# Altium PCB STM32F302VC_EVM.PcbDoc (part 2 of 19)
Units mil, origin at the board's own origin, x right, y up, seen from the top; angles counter-clockwise.
Board outline 3937.01 x 3937.01 mil, 2 copper layers (Top Layer, Bottom Layer); 117 components, 166 nets, 602 pads, 373 vias.
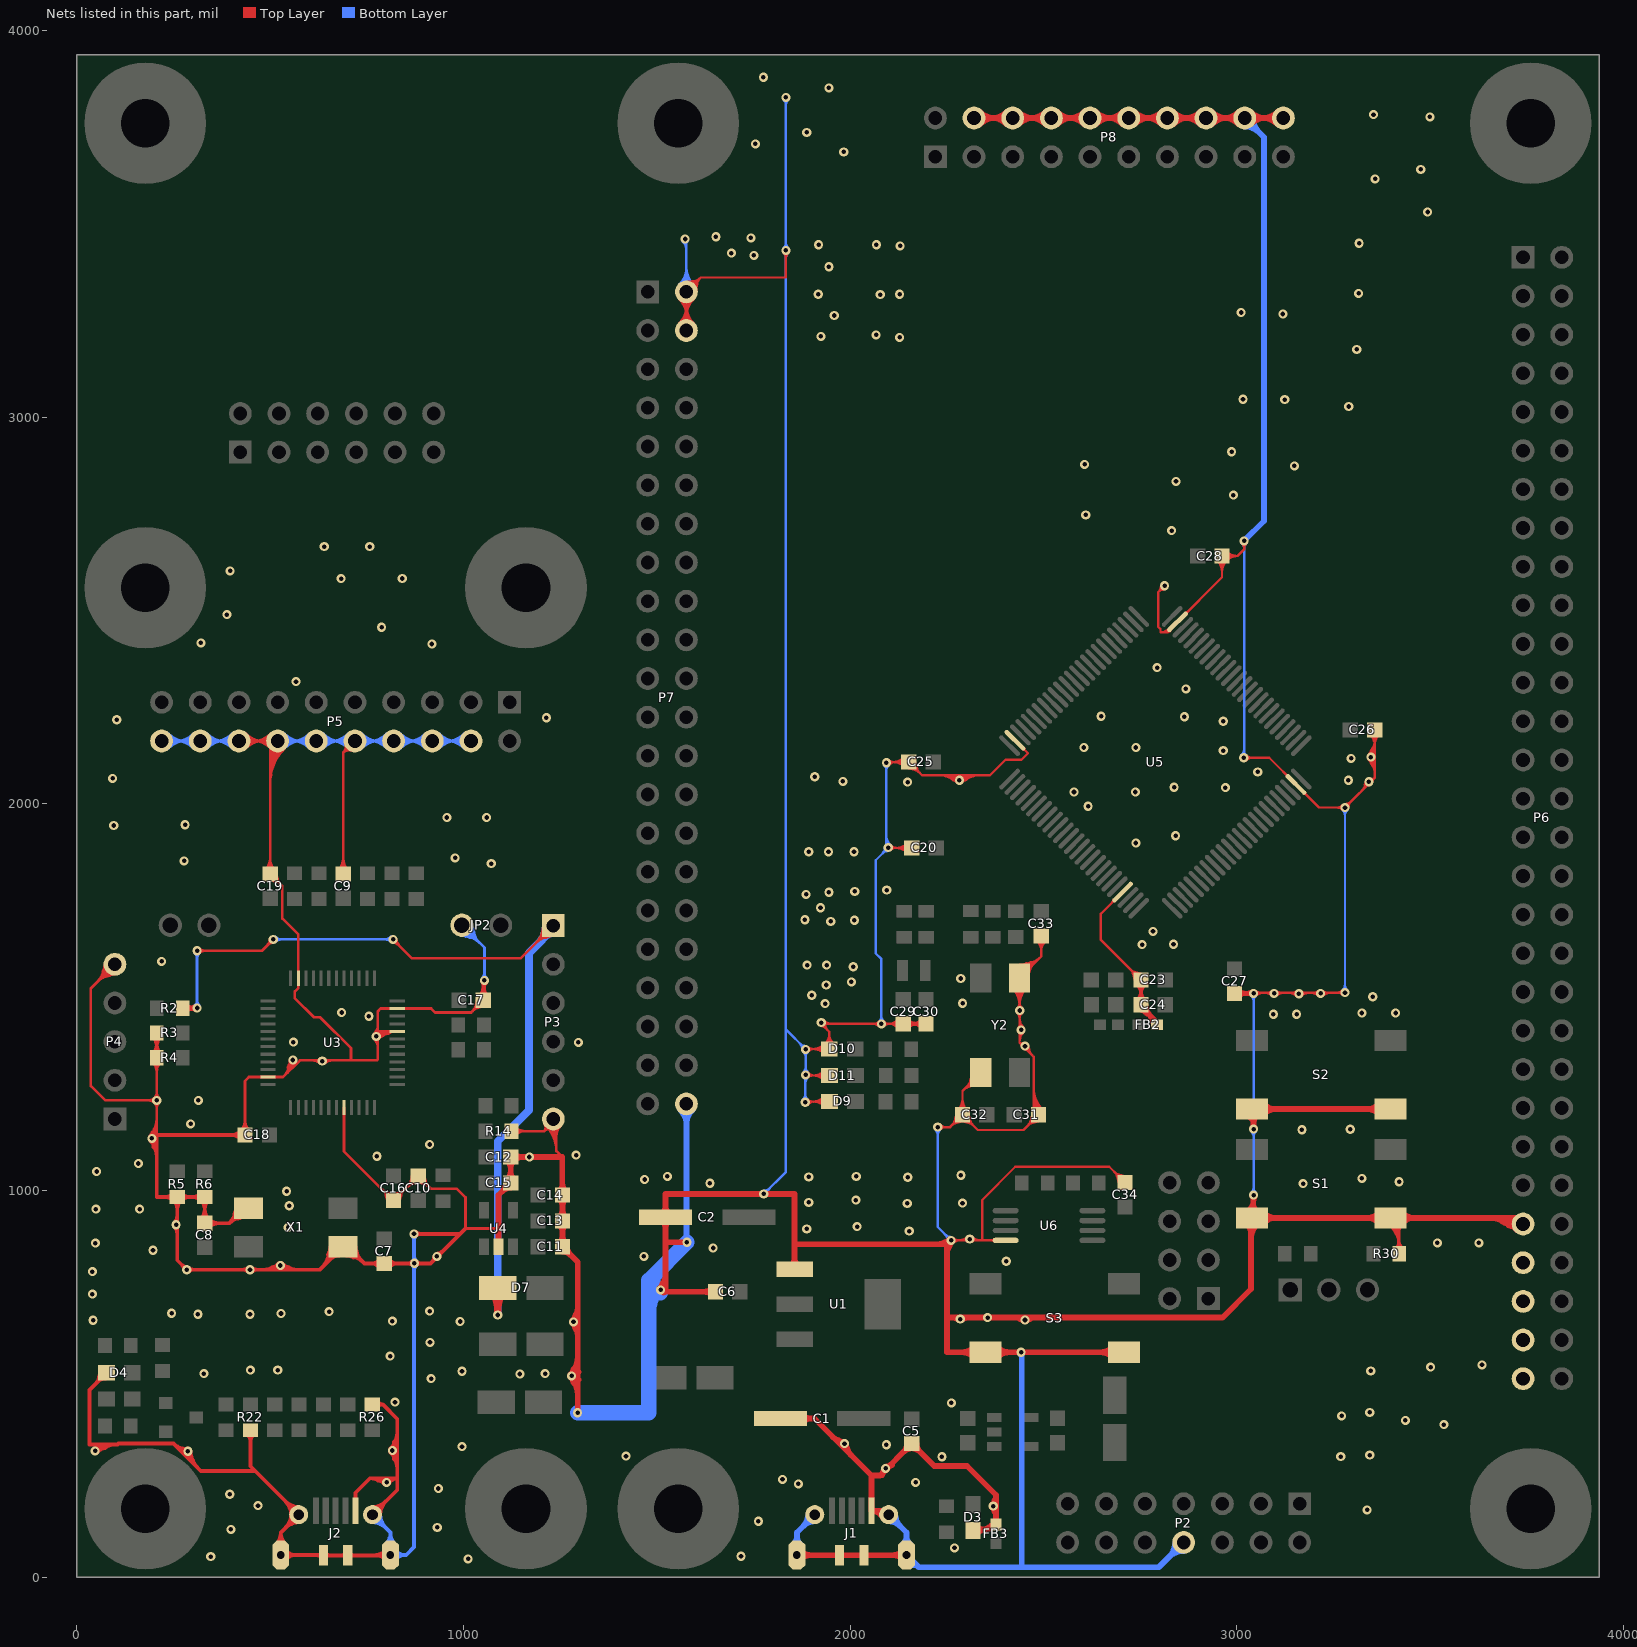
[diagram p2: the nets of this part, all layers, seen from the top]

## Via types
v1: diameter 23.62, hole 11.81, Top Layer to Bottom Layer, tented both sides, 372 vias
v2: diameter 50, hole 28, Top Layer to Bottom Layer, tented both sides, 1 vias

## Nets (pads, with @x,y where several pads share a name; then routed paths per layer and width w, separated by ;. In a path a pad name is that pad's centre, name@x,y a point inside that pad or via, vN(x,y) a via of type N, cw(c..) or ccw(c..) an arc to the next point about the centre after c; other vN are vias at no path point) (continued)
AVDD: C23.2 C24.2 FB2.2 U5.22 | length 2610.4
  Top Layer w6: U5.22@2704.46,1771.83 2648.25,1715.62 2648.25,1648.15 C23.2@2751.97,1544.43 ; 2678.62,1745.99 cw(c2683.58,1741.03) U5.22@2683.58,1748.04 ; 2678.62,1745.99 ccw(c2673.66,1750.95) U5.22@2680.68,1750.95 ; 2678.62,1745.99 ccw(c2673.66,1750.95) U5.22@2680.68,1750.95 ; 2678.62,1745.99 cw(c2683.58,1741.03) U5.22@2683.58,1748.04 ; 2678.62,1745.99 ccw(c2673.66,1750.95) U5.22@2680.68,1750.95 ; 2678.62,1745.99 cw(c2683.58,1741.03) U5.22@2683.58,1748.04 ; 2723.49,1572.91 cw(c2695,1544.43) C23.2@2735.28,1544.43 ; 2723.49,1572.91 ccw(c2751.97,1601.4) C23.2@2751.97,1561.11 ; 2723.49,1572.91 ccw(c2751.97,1601.4) C23.2@2751.97,1561.11 ; 2723.49,1572.91 cw(c2695,1544.43) C23.2@2735.28,1544.43 ; 2723.49,1572.91 ccw(c2751.97,1601.4) C23.2@2751.97,1561.11 ; 2723.49,1572.91 cw(c2695,1544.43) C23.2@2735.28,1544.43 ; 2730.2,1563.39 ccw(c2757.34,1570.67) C23.2@2751.7,1543.14 ; 2730.2,1563.39 ccw(c2757.34,1570.67) C23.2@2751.7,1543.14 ; 2730.2,1563.39 ccw(c2757.34,1570.67) C23.2@2751.7,1543.14 ; C23.2@2732.71,1554.02 ccw(c2755.16,1560.03) C23.2@2750.5,1537.26 ; C23.2@2732.71,1554.02 ccw(c2755.16,1560.03) C23.2@2750.5,1537.26 ; C23.2@2732.71,1554.02 ccw(c2755.16,1560.03) C23.2@2750.5,1537.26 ; 2733,1566.2 cw(c2725.73,1539.06) C23.2@2753.26,1544.69 ; 2733,1566.2 cw(c2725.73,1539.06) C23.2@2753.26,1544.69 ; 2733,1566.2 cw(c2725.73,1539.06) C23.2@2753.26,1544.69 ; C23.2@2733.73,1562.67 cw(c2715.49,1544.43) C23.2@2741.28,1544.43 ; C23.2@2733.73,1562.67 ccw(c2751.97,1580.91) C23.2@2751.97,1555.11 ; C23.2@2733.73,1562.67 ccw(c2751.97,1580.91) C23.2@2751.97,1555.11 ; C23.2@2733.73,1562.67 cw(c2715.49,1544.43) C23.2@2741.28,1544.43 ; C23.2@2733.73,1562.67 ccw(c2751.97,1580.91) C23.2@2751.97,1555.11 ; C23.2@2733.73,1562.67 cw(c2715.49,1544.43) C23.2@2741.28,1544.43 ; C23.2@2742.38,1563.68 cw(c2736.37,1541.23) C23.2@2759.13,1545.9 ; C23.2@2742.38,1563.68 cw(c2736.37,1541.23) C23.2@2759.13,1545.9 ; C23.2@2742.38,1563.68 cw(c2736.37,1541.23) C23.2@2759.13,1545.9
  Top Layer w10: C23.2@2751.97,1544.43 C24.2@2751.97,1480.45 2751.97,1478.54 2793.31,1437.2 FB2.2@2793.31,1429.13 ; C24.2@2741.58,1490.84 ccw(c2716.52,1515.91) 2751.97,1515.91 ; C24.2@2741.58,1490.84 ccw(c2716.52,1515.91) 2751.97,1515.91 ; C24.2@2741.58,1490.84 ccw(c2716.52,1515.91) 2751.97,1515.91 ; C23.2@2741.58,1534.05 cw(c2716.52,1508.98) 2751.97,1508.98 ; C23.2@2741.58,1534.05 cw(c2716.52,1508.98) 2751.97,1508.98 ; C23.2@2741.58,1534.05 cw(c2716.52,1508.98) 2751.97,1508.98 ; C24.2@2748.17,1466.27 cw(c2734.25,1414.31) FB2.2@2780.83,1441.21 ; C24.2@2748.17,1466.27 cw(c2734.25,1414.31) FB2.2@2780.83,1441.21 ; C24.2@2748.17,1466.27 cw(c2734.25,1414.31) FB2.2@2780.83,1441.21 ; C24.2@2748.17,1466.27 cw(c2734.25,1414.31) FB2.2@2780.83,1441.21 ; C24.2@2748.17,1466.27 cw(c2734.25,1414.31) FB2.2@2780.83,1441.21 ; C24.2@2750.76,1475.93 cw(c2743.08,1447.29) C24.2@2768.76,1462.11 ; C24.2@2750.76,1475.93 cw(c2743.08,1447.29) C24.2@2768.76,1462.11 ; C24.2@2750.76,1475.93 cw(c2743.08,1447.29) C24.2@2768.76,1462.11 ; C24.2@2750.76,1475.93 cw(c2743.08,1447.29) C24.2@2768.76,1462.11 ; C24.2@2750.76,1475.93 cw(c2743.08,1447.29) C24.2@2768.76,1462.11 ; C24.2@2751.97,1465.77 cw(c2751.97,1434.94) 2773.77,1456.74 ; C24.2@2751.97,1465.77 cw(c2751.97,1434.94) 2773.77,1456.74 ; C24.2@2751.97,1465.77 cw(c2751.97,1434.94) 2773.77,1456.74 ; 2751.97,1508.98 cw(c2787.42,1508.98) C23.2@2762.35,1534.05 ; 2751.97,1508.98 cw(c2787.42,1508.98) C23.2@2762.35,1534.05 ; 2751.97,1508.98 cw(c2787.42,1508.98) C23.2@2762.35,1534.05 ; 2751.97,1515.91 ccw(c2787.42,1515.91) C24.2@2762.35,1490.84 ; 2751.97,1515.91 ccw(c2787.42,1515.91) C24.2@2762.35,1490.84 ; 2751.97,1515.91 ccw(c2787.42,1515.91) C24.2@2762.35,1490.84 ; C24.2@2753.26,1485.61 cw(c2747.76,1463.7) C24.2@2769.57,1469.55 ; C24.2@2753.26,1485.61 cw(c2747.76,1463.7) C24.2@2769.57,1469.55 ; C24.2@2753.26,1485.61 cw(c2747.76,1463.7) C24.2@2769.57,1469.55 ; C24.2@2756.55,1479.49 ccw(c2778.78,1474.82) 2767.42,1455.15 ; C24.2@2756.55,1479.49 ccw(c2778.78,1474.82) 2767.42,1455.15 ; C24.2@2756.55,1479.49 ccw(c2778.78,1474.82) 2767.42,1455.15 ; C24.2@2756.55,1479.49 ccw(c2778.78,1474.82) 2767.42,1455.15 ; C24.2@2766.15,1476.65 ccw(c2782.69,1472.22) C24.2@2767.86,1463.66 ; C24.2@2766.15,1476.65 ccw(c2782.69,1472.22) C24.2@2767.86,1463.66 ; C24.2@2766.15,1476.65 ccw(c2782.69,1472.22) C24.2@2767.86,1463.66 ; C24.2@2766.15,1476.65 ccw(c2782.69,1472.22) C24.2@2767.86,1463.66 ; C24.2@2766.15,1476.65 ccw(c2782.69,1472.22) C24.2@2767.86,1463.66 ; C24.2@2766.65,1480.45 ccw(c2806.73,1480.45) 2778.39,1452.12 ; C24.2@2766.65,1480.45 ccw(c2806.73,1480.45) 2778.39,1452.12 ; C24.2@2766.65,1480.45 ccw(c2806.73,1480.45) 2778.39,1452.12 ; C24.2@2769.26,1461.25 cw(c2737.14,1429.13) FB2.2@2782.56,1429.13 ; C24.2@2769.26,1461.25 cw(c2737.14,1429.13) FB2.2@2782.56,1429.13 ; C24.2@2769.26,1461.25 cw(c2737.14,1429.13) FB2.2@2782.56,1429.13 ; 2775.25,1446.79 cw(c2757.59,1429.13) FB2.2@2782.56,1429.13 ; 2775.25,1446.79 cw(c2757.59,1429.13) FB2.2@2782.56,1429.13 ; 2775.25,1446.79 cw(c2757.59,1429.13) FB2.2@2782.56,1429.13 ; 2775.25,1446.79 cw(c2757.59,1429.13) FB2.2@2782.56,1429.13 ; 2775.25,1446.79 cw(c2757.59,1429.13) FB2.2@2782.56,1429.13 ; 2775.25,1446.79 cw(c2757.59,1429.13) FB2.2@2782.56,1429.13 ; 2778.74,1443.38 ccw(c2802.7,1449.8) FB2.2@2790.75,1428.06 ; 2778.74,1443.38 ccw(c2802.7,1449.8) FB2.2@2790.75,1428.06 ; 2778.74,1443.38 ccw(c2802.7,1449.8) FB2.2@2790.75,1428.06 ; 2779.02,1443.02 ccw(c2791.34,1455.34) FB2.2@2791.34,1437.91 ; 2779.02,1443.02 ccw(c2791.34,1455.34) FB2.2@2791.34,1437.91 ; 2779.02,1443.02 ccw(c2791.34,1455.34) FB2.2@2791.34,1437.91 ; 2779.02,1443.02 ccw(c2791.34,1455.34) FB2.2@2791.34,1437.91 ; 2779.02,1443.02 ccw(c2791.34,1455.34) FB2.2@2791.34,1437.91 ; 2779.02,1443.02 ccw(c2791.34,1455.34) FB2.2@2791.34,1437.91 ; 2786.33,1444.18 cw(c2771.28,1429.13) FB2.2@2792.56,1429.13 ; 2786.33,1444.18 cw(c2771.28,1429.13) FB2.2@2792.56,1429.13 ; 2786.33,1444.18 cw(c2771.28,1429.13) FB2.2@2792.56,1429.13
E5V: D7.2 P3.1 R2.1 | length 5067.3
  Top Layer w7: R2.1@273.62,1471.46 274.25,1472.08 v1(311.02,1472.08) ; v1(311.02,1620.08) 478.35,1620.08 v1(507.87,1649.61) ; v1(817.91,1649.61) 867.13,1600.39 1147.64,1600.39 P3.1@1232.28,1685.04 ; R2.1@278.72,1466.35 cw(c292.56,1452.52) 292.56,1472.08 ; R2.1@278.72,1466.35 cw(c292.56,1452.52) 292.56,1472.08 ; R2.1@278.72,1466.35 cw(c292.56,1452.52) 292.56,1472.08 ; R2.1@283.67,1461.4 cw(c309.46,1435.62) v1@309.46,1472.08 ; R2.1@283.67,1461.4 cw(c309.46,1435.62) v1@309.46,1472.08 ; R2.1@283.67,1461.4 cw(c309.46,1435.62) v1@309.46,1472.08 ; R2.1@283.67,1481.51 ccw(c306.43,1504.26) v1@306.43,1472.08 ; R2.1@283.67,1481.51 ccw(c306.43,1504.26) v1@306.43,1472.08 ; R2.1@283.67,1481.51 ccw(c306.43,1504.26) v1@306.43,1472.08 ; R2.1@290.96,1472.08 cw(c290.96,1452.02) v1@305.15,1466.21 ; R2.1@290.96,1472.08 ccw(c290.96,1492.15) v1@305.15,1477.96 ; R2.1@290.96,1472.08 ccw(c290.96,1492.15) v1@305.15,1477.96 ; R2.1@290.96,1472.08 cw(c290.96,1452.02) v1@305.15,1466.21 ; R2.1@290.96,1472.08 ccw(c290.96,1492.15) v1@305.15,1477.96 ; R2.1@290.96,1472.08 cw(c290.96,1452.02) v1@305.15,1466.21 ; 291.9,1467.38 cw(c296.64,1449.73) v1@306.53,1465.1 ; 291.9,1467.38 cw(c296.64,1449.73) v1@306.53,1465.1 ; 291.9,1467.38 cw(c296.64,1449.73) v1@306.53,1465.1 ; 291.9,1467.38 cw(c296.64,1449.73) v1@306.53,1465.1 ; 291.9,1467.38 cw(c296.64,1449.73) v1@306.53,1465.1 ; 291.9,1467.38 cw(c296.64,1449.73) v1@306.53,1465.1 ; 292.33,1475.86 ccw(c296.34,1490.84) v1@305.9,1478.63 ; 292.33,1475.86 ccw(c296.34,1490.84) v1@305.9,1478.63 ; 292.33,1475.86 ccw(c296.34,1490.84) v1@305.9,1478.63 ; 292.33,1475.86 ccw(c296.34,1490.84) v1@305.9,1478.63 ; 292.33,1475.86 ccw(c296.34,1490.84) v1@305.9,1478.63 ; 292.33,1475.86 ccw(c296.34,1490.84) v1@305.9,1478.63 ; 292.48,1467.54 ccw(c287.65,1485.58) v1@303.83,1476.24 ; 292.48,1467.54 ccw(c287.65,1485.58) v1@303.83,1476.24 ; 292.48,1467.54 ccw(c287.65,1485.58) v1@303.83,1476.24 ; 292.48,1467.54 ccw(c287.65,1485.58) v1@303.83,1476.24 ; 292.48,1467.54 ccw(c287.65,1485.58) v1@303.83,1476.24 ; 292.48,1467.54 ccw(c287.65,1485.58) v1@303.83,1476.24 ; 294.11,1475.39 cw(c289.97,1459.93) v1@303.83,1467.93 ; 294.11,1475.39 cw(c289.97,1459.93) v1@303.83,1467.93 ; 294.11,1475.39 cw(c289.97,1459.93) v1@303.83,1467.93 ; 294.11,1475.39 cw(c289.97,1459.93) v1@303.83,1467.93 ; 294.11,1475.39 cw(c289.97,1459.93) v1@303.83,1467.93 ; 294.11,1475.39 cw(c289.97,1459.93) v1@303.83,1467.93 ; v1@316.9,1614.2 cw(c331.09,1600.01) 331.09,1620.08 ; v1@316.9,1614.2 cw(c331.09,1600.01) 331.09,1620.08 ; v1@316.9,1614.2 cw(c331.09,1600.01) 331.09,1620.08 ; v1@316.9,1625.96 ccw(c331.09,1640.14) 331.09,1620.08 ; v1@316.9,1625.96 ccw(c331.09,1640.14) 331.09,1620.08 ; v1@316.9,1625.96 ccw(c331.09,1640.14) 331.09,1620.08 ; 493.69,1635.42 cw(c507.87,1621.23) v1@507.87,1641.3 ; 493.69,1635.42 ccw(c479.5,1649.61) v1@499.56,1649.61 ; 493.69,1635.42 ccw(c479.5,1649.61) v1@499.56,1649.61 ; 493.69,1635.42 cw(c507.87,1621.23) v1@507.87,1641.3 ; 493.69,1635.42 ccw(c479.5,1649.61) v1@499.56,1649.61 ; 493.69,1635.42 cw(c507.87,1621.23) v1@507.87,1641.3 ; 495.35,1637.94 ccw(c491.32,1653) v1@506.59,1649.87 ; 495.35,1637.94 ccw(c491.32,1653) v1@506.59,1649.87 ; 495.35,1637.94 ccw(c491.32,1653) v1@506.59,1649.87 ; 496.21,1637.09 cw(c511.26,1633.05) v1@508.14,1648.32 ; 496.21,1637.09 cw(c511.26,1633.05) v1@508.14,1648.32 ; 496.21,1637.09 cw(c511.26,1633.05) v1@508.14,1648.32 ; v1@817.65,1648.32 cw(c814.52,1633.05) 829.58,1637.09 ; v1@817.65,1648.32 cw(c814.52,1633.05) 829.58,1637.09 ; v1@817.65,1648.32 cw(c814.52,1633.05) 829.58,1637.09 ; v1@817.91,1641.3 cw(c817.91,1621.23) 832.1,1635.42 ; v1@817.91,1641.3 cw(c817.91,1621.23) 832.1,1635.42 ; v1@817.91,1641.3 cw(c817.91,1621.23) 832.1,1635.42 ; v1@819.2,1649.87 ccw(c834.47,1653) 830.43,1637.94 ; v1@819.2,1649.87 ccw(c834.47,1653) 830.43,1637.94 ; v1@819.2,1649.87 ccw(c834.47,1653) 830.43,1637.94 ; v1@826.22,1649.61 ccw(c846.29,1649.61) 832.1,1635.42 ; v1@826.22,1649.61 ccw(c846.29,1649.61) 832.1,1635.42 ; v1@826.22,1649.61 ccw(c846.29,1649.61) 832.1,1635.42 ; 1187.85,1640.61 cw(c1232.28,1596.18) P3.1@1232.28,1659.01 ; 1187.85,1640.61 ccw(c1143.42,1685.04) P3.1@1206.26,1685.04 ; 1187.85,1640.61 ccw(c1143.42,1685.04) P3.1@1206.26,1685.04 ; 1187.85,1640.61 cw(c1232.28,1596.18) P3.1@1232.28,1659.01 ; 1187.85,1640.61 ccw(c1143.42,1685.04) P3.1@1206.26,1685.04 ; 1187.85,1640.61 cw(c1232.28,1596.18) P3.1@1232.28,1659.01 ; 1199.8,1652.56 cw(c1232.28,1620.08) P3.1@1232.28,1666.01 ; 1199.8,1652.56 ccw(c1167.32,1685.04) P3.1@1213.26,1685.04 ; 1199.8,1652.56 ccw(c1167.32,1685.04) P3.1@1213.26,1685.04 ; 1199.8,1652.56 cw(c1232.28,1620.08) P3.1@1232.28,1666.01 ; 1199.8,1652.56 ccw(c1167.32,1685.04) P3.1@1213.26,1685.04 ; 1199.8,1652.56 cw(c1232.28,1620.08) P3.1@1232.28,1666.01 ; 1202.58,1651.05 ccw(c1191.21,1693.45) P3.1@1234.22,1684.64 ; 1202.58,1651.05 ccw(c1191.21,1693.45) P3.1@1234.22,1684.64 ; 1202.58,1651.05 ccw(c1191.21,1693.45) P3.1@1234.22,1684.64 ; 1213.52,1653.98 ccw(c1203.62,1690.91) P3.1@1241.07,1683.24 ; 1213.52,1653.98 ccw(c1203.62,1690.91) P3.1@1241.07,1683.24 ; 1213.52,1653.98 ccw(c1203.62,1690.91) P3.1@1241.07,1683.24
  Top Layer w20: v1(1088.58,678.15) D7.2@1088.58,748.03 ; D7.2@1074.08,733.53 cw(c1039.06,698.51) 1088.58,698.51 ; D7.2@1074.08,733.53 cw(c1039.06,698.51) 1088.58,698.51 ; D7.2@1074.08,733.53 cw(c1039.06,698.51) 1088.58,698.51 ; 1088.58,698.51 cw(c1138.1,698.51) D7.2@1103.09,733.53 ; 1088.58,698.51 cw(c1138.1,698.51) D7.2@1103.09,733.53 ; 1088.58,698.51 cw(c1138.1,698.51) D7.2@1103.09,733.53
  Bottom Layer w7: v1(311.02,1472.08) v1(311.02,1620.08) ; v1(507.87,1649.61) v1(817.91,1649.61) ; v1@305.15,1477.96 ccw(c290.96,1492.15) 311.02,1492.15 ; v1@305.15,1477.96 ccw(c290.96,1492.15) 311.02,1492.15 ; v1@305.15,1477.96 ccw(c290.96,1492.15) 311.02,1492.15 ; v1@305.15,1614.2 cw(c290.96,1600.01) 311.02,1600.01 ; v1@305.15,1614.2 cw(c290.96,1600.01) 311.02,1600.01 ; v1@305.15,1614.2 cw(c290.96,1600.01) 311.02,1600.01 ; 311.02,1492.15 ccw(c331.09,1492.15) v1@316.9,1477.96 ; 311.02,1492.15 ccw(c331.09,1492.15) v1@316.9,1477.96 ; 311.02,1492.15 ccw(c331.09,1492.15) v1@316.9,1477.96 ; 311.02,1600.01 cw(c331.09,1600.01) v1@316.9,1614.2 ; 311.02,1600.01 cw(c331.09,1600.01) v1@316.9,1614.2 ; 311.02,1600.01 cw(c331.09,1600.01) v1@316.9,1614.2 ; v1@513.75,1643.73 cw(c527.94,1629.54) 527.94,1649.61 ; v1@513.75,1643.73 cw(c527.94,1629.54) 527.94,1649.61 ; v1@513.75,1643.73 cw(c527.94,1629.54) 527.94,1649.61 ; v1@513.75,1655.48 ccw(c527.94,1669.67) 527.94,1649.61 ; v1@513.75,1655.48 ccw(c527.94,1669.67) 527.94,1649.61 ; v1@513.75,1655.48 ccw(c527.94,1669.67) 527.94,1649.61 ; 797.85,1649.61 cw(c797.85,1629.54) v1@812.04,1643.73 ; 797.85,1649.61 ccw(c797.85,1669.67) v1@812.04,1655.48 ; 797.85,1649.61 ccw(c797.85,1669.67) v1@812.04,1655.48 ; 797.85,1649.61 cw(c797.85,1629.54) v1@812.04,1643.73 ; 797.85,1649.61 ccw(c797.85,1669.67) v1@812.04,1655.48 ; 797.85,1649.61 cw(c797.85,1629.54) v1@812.04,1643.73
  Bottom Layer w20: v1(1088.58,678.15) 1088.58,1126.97 1169.29,1207.68 1169.29,1614.17 P3.1@1240.16,1685.04 ; 1193.38,1638.26 ccw(c1146.6,1685.04) P3.1@1212.76,1685.04 ; 1193.38,1638.26 ccw(c1146.6,1685.04) P3.1@1212.76,1685.04 ; 1193.38,1638.26 ccw(c1146.6,1685.04) P3.1@1212.76,1685.04 ; P3.1@1212.39,1657.27 cw(c1232.28,1637.38) P3.1@1232.28,1665.51 ; P3.1@1212.39,1657.27 cw(c1232.28,1637.38) P3.1@1232.28,1665.51 ; P3.1@1212.39,1657.27 cw(c1232.28,1637.38) P3.1@1232.28,1665.51
GND: C1.2 C2.2 C5.1 C6.1 C7.2 C8.2 C9.2 C10.1 C11.1 C12.1 C13.1 C14.1 C15.1 C16.1 C17.1 C18.1 C19.1 C20.1 C25.1 C26.1 C27.1 C28.1 C29.1 C30.1 C31.1 C32.1 C33.1 C34.1 D3.2 D4.2 D9.2 D10.2 D11.2 FB3.1 J1.5 J1.6 J1.7 J1.8 J1.9 J1.10 J1.11 J2.5 J2.6 J2.7 J2.8 J2.9 J2.10 J2.11 JP2.1 P2.8 P3.6 P4.5 P5.4 P5.6 P5.8 P5.10 P5.12 P5.14 P5.16 P5.18 P5.20 P6.51 P6.53 P6.55 P6.57 P6.59 P7.2 P7.4 P7.44 P8.4 P8.6 P8.8 P8.10 P8.12 P8.14 P8.16 P8.18 P8.20 R3.2 R4.1 R5.1 R6.1 R14.1 R22.1 R26.2 R30.2 S1.1 S1.2 S2.1 S2.2 S3.1 S3.2 U1.1 U3.8 U3.20 U3.23 U3.35 U3.47 U4.2 U5.49 U5.74 U5.99 U6.4 X1.2 X1.4 Y2.2 Y2.4 | length 109517.9